# Altium PCB ESP-OLED.PcbDoc
Units mm, origin at the board's own origin, x right, y up, seen from the top; angles counter-clockwise.
Board outline 30.99 x 15.24 mm, 2 copper layers (Top Layer, Bottom Layer); 13 components, 11 nets, 67 pads, 0 vias.
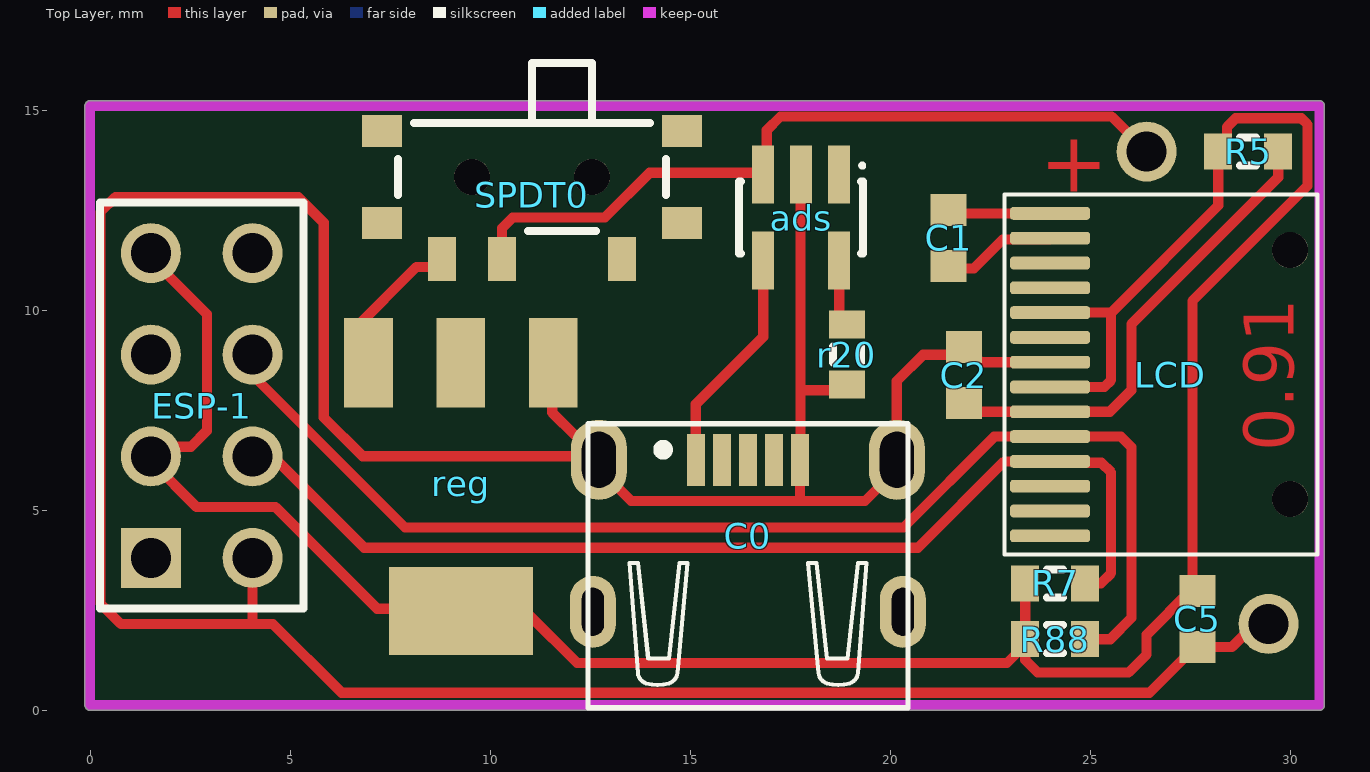
[diagram p0: Top Layer view]
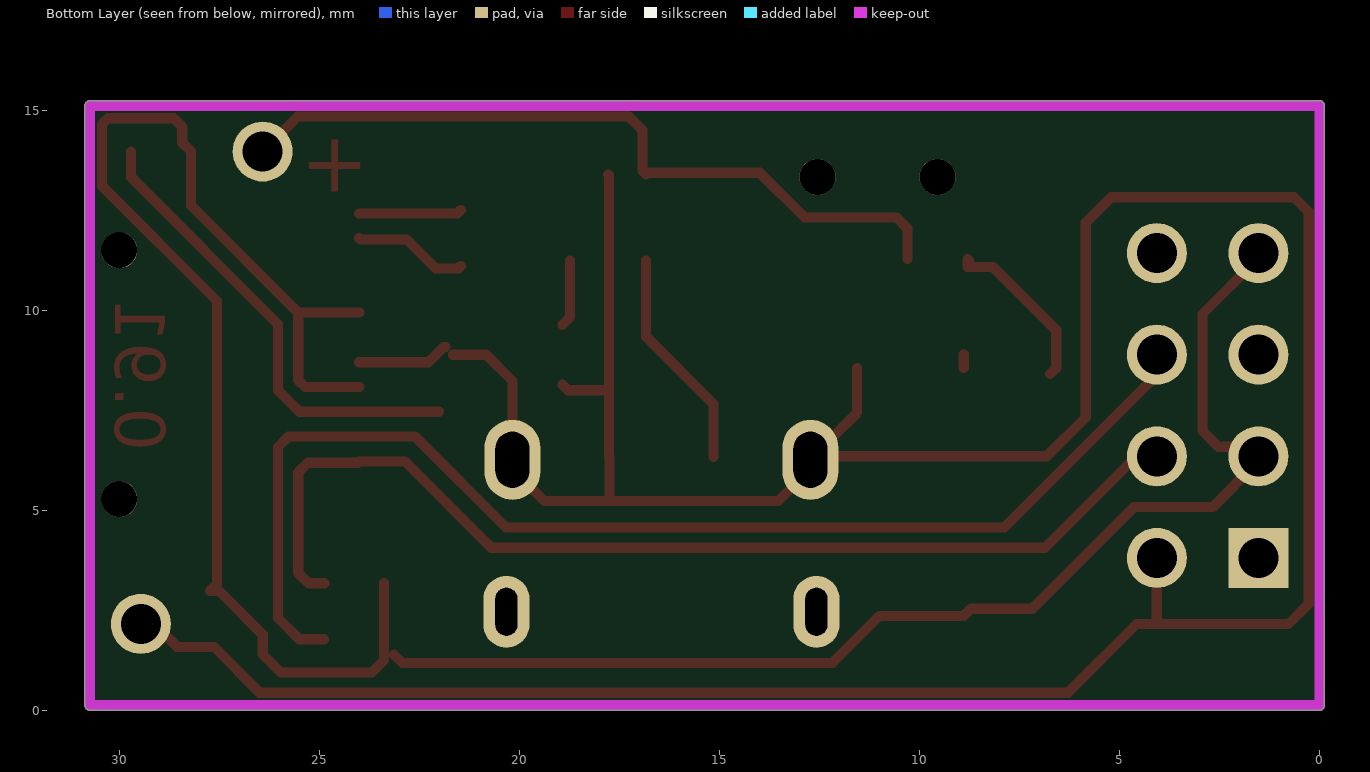
[diagram p1: Bottom Layer view, seen from below]

## Layer stack, top to bottom
Top Solder: solder mask 0.0102, Solder Resist, Dk 3.5
Top Layer: signal copper 0.0356
Dielectric 1: dielectric 0.32, FR-4, Dk 4.8
Bottom Layer: signal copper 0.0356
Bottom Solder: solder mask 0.0102, Solder Resist, Dk 3.5

## Board outline
0,0 cw(c0,0.127) -0.127,0.127 -0.127,15.113 cw(c0,15.113) 0,15.24 30.734,15.24 cw(c30.734,15.113) 30.861,15.113 30.861,0.127 cw(c30.734,0.127) 30.734,0

## Design rules (kind name [scope] priority, off if disabled: settings)
Clearance Clearance_1 [OnLayer('Keep-Out Layer')] p1: gap=0.01 ignorepadtopadclearanceinfootprint=FALSE
Clearance [All] p2: gap=0.254 ignorepadtopadclearanceinfootprint=FALSE except(0: SMDPad-SMDPad)
ComponentClearance [All] p1: gap=0 collisioncheckmode=3 verticalgap=0 showdistances=TRUE
PolygonConnect [All] p1: connectstyle=Relief reliefconductorwidth=0.254 reliefentries=4 polygonreliefangle="90 Angle" airgapwidth=0.254
RoutingVias [All] p1: holewidth=0.711 width=1.27 viastyle="Through Hole" minholewidth=0.711 minwidth=1.27 maxholewidth=0.711 maxwidth=1.27
SolderMaskExpansion [All] p1: expansion=0.102
Width [All] p1: maxlimit=0.254 minlimit=0.254 preferedwidth=0.254
29 further rules are at their usual default settings.

## Components (designator, comment, footprint, x,y, rotation, side; value= is the part's Value field where it differs from the comment)
ads "LTC4054-4.2" S5 17.78,12.319 r180 top
C0 "WR-Communication Connectors 629105150521" 629105150521_no_fixtures 16.448,6.263 r0 top
C1 "Cap Semi" 1608[0603] 21.463,11.811 r90 top value=1uF
C2 "Cap Semi" 1608[0603] 21.844,8.382 r270 top value=1uF
C5 "Cap Semi" 1608[0603] 27.686,2.286 r90 top value=4.7uF
ESP-1 "Header 4X2" ESP-01 0.254,2.54 r0 top
LCD "Header 14" OLED0.91 24.003,12.423 r270 top
R5 "Res3" J1-0603 28.956,13.97 r180 top value=10K
R7 "Res3" J1-0603 24.13,3.175 r180 top value=10K
r20 "Res3" J1-0603 18.923,8.89 r270 top value=3.3k
R88 "Res3" J1-0603 24.13,1.778 r180 top value=10K
reg "AMS1117-3.3" SOT223 9.271,5.588 r270 top
SPDT0 "450404015514" 450404015514 11.049,13.335 r0 top

## Footprints (in the part's own frame and the unit in brackets; to place one, negate y for a bottom-side part, rotate by r counter-clockwise, add the part's x,y. Pads: shape width x height; smd on the part's side, far side on the other; paste and mask are expansions set on the pad)
1608[0603] [mm] "Chip Capacitor, Body 1.6x0.8mm, IPC High Density"
  rect 0.8x0.9 smd: 1(-0.7,0) 2(0.7,0)
  body extent -0.87,-0.48 0.87,0.48, height 1.3
450404015514 [mm] "Right angle Slide Switch"
  rect 0.7x1.1 smd: 1(2.25,-2.05) 2(-0.75,-2.05) 3(-2.25,-2.05)
  round 0.9 hole 0.9 unplated: M1(-1.5,0) M2(1.5,0)
  rect 1x0.8 smd: M3(-3.75,1.15) M4(3.75,1.15) M5(-3.75,-1.15) M6(3.75,-1.15)
  silkscreen extent -3.35,-1.35 3.35,2.85, body extent -3.85,-2.25 3.85,2.88, height 1.4
629105150521_no_fixtures [mm] "WR-COM_USB_Micro Type B_Horizontal_SMT Micro Type B Horizontal SMT - 3A current at Pin1 & Pin 5 - with Pegs and THT shielding Pins  - T&R Packaging"
  rect 0.45x1.3 smd: 1(-1.3,0) 2(-0.65,0) 3(0,0) 4(0.65,0) 5(1.3,0)
  oval 1.4x2 hole 0.85 slot 1.4 at 90 deg: Z1(-3.725,0) Z2(3.725,0)
  oval 1.15x1.8 hole 0.55 slot 1.2 at 90 deg: Z4(-3.875,-3.8) Z4(3.875,-3.8)
  silkscreen extent -4,-6.2 4,0.9, body extent -4,-6.25 4,0.35, height 2.67
ESP-01 [mm]
  rect 1.5x1.5 hole 1: 1(1.27,1.27)
  round 1.5 hole 1: 2(3.81,1.27) 3(1.27,3.81) 4(3.81,3.81) 5(1.27,6.35) 6(3.81,6.35) 7(1.27,8.89) 8(3.81,8.89)
  silkscreen extent 0,0 5.08,10.16, body extent -0.25,-2.54 24.55,12.34, height 11.5
J1-0603 [mm] "Chip Resistor, Body 1.6x0.8mm, IPC High Density"
  rect 0.7x0.9 smd: 1(-0.75,0) 2(0.75,0)
  silkscreen extent -0.2,-0.35 0.2,0.35, body extent -0.85,-0.48 0.85,0.48, height 0.9
OLED0.91 [mm]
  rrect50% 0.32x2 smd: 1(0,0) 2(0.62,0) 3(1.24,0) 4(1.86,0) 5(2.48,0) 6(3.1,0) 7(3.72,0) 8(4.34,0) 9(4.96,0) 10(5.58,0) 11(6.2,0) 12(6.82,0) 13(7.44,0) 14(8.06,0)
  round 0.9 hole 0.9 unplated: 6(0.92,6) 6(7.14,6)
  silkscreen extent -0.47,-1.14 8.53,6.69, body extent -0.46,-23.65 11.05,11.25, height 0.08
S5 [mm] "SOT-23/SC-74A; 5 Leads; Body 3.1 x 3 mm, inc. leads (LxW max)"
  rect 0.55x1.45 smd: 1(-0.95,-1.075) 2(0,-1.075) 3(0.95,-1.075) 4(0.95,1.075) 5(-0.95,1.075)
  silkscreen extent -1.58,-1.35 1.55,0.9
SOT223 [mil]
  rect 88x48 smd: 1(-122,91) 2(-122,0) 3(-122,-91)
  rect 86.61x141.73 smd: 2(122.01,0)

## Part data
C0: "WR-COM_USB_Micro Type B_Horizontal_SMT", Manufacturer="Würth Elektronik eiSos GmbH", partNo=629105150521, ComponentLink1 Description=Manufacturer, ComponentLink1URL=http://www.we-online.de, ComponentLink2 Description=Datasheet, ComponentLink2URL=http://katalog.we-online.de/em/datasheet/629105150521.pdf, Created by="Karrer Zheng", Created Date=10/21/2014, NoPins=5
C1 C2 C5: "Capacitor (Semiconductor SIM Model)", LatestRevisionDate=29-May-2009, LatestRevisionNote="IPC-7351 Footprint Added.", PackageDescription="Chip Capacitor", PackageReference=C1206, Published=8-Jun-2000, Publisher="Altium Limited"
ESP-1: "Header, 4-Pin, Dual row", LatestRevisionDate=17-Jul-2002, LatestRevisionNote="Re-released for DXP Platform.", Publisher="Altium Limited"
LCD: "Header, 14-Pin", LatestRevisionDate=17-Jul-2002, LatestRevisionNote="Re-released for DXP Platform.", Publisher="Altium Limited"
R5 R7 r20 R88: "Resistor", LatestRevisionDate=29-May-2009, LatestRevisionNote="IPC-7351 Footprint Added.", PackageDescription="Chip Resistor", PackageReference=J1-0603, Published=8-Jun-2000, Publisher="Altium Limited"
SPDT0: "WS-SLSU Mini SMT Slide Switch, Same Side Connection, Right Angled, SPDT", Operating Temperature="-40 to +85degC", Rated Current=300mA, Rated Voltage=5VDC, Circuit=SPDT, ComponentLink1Description=Manufacturer, ComponentLink1URL=http://www.we-online.de, ComponentLink2Description=Datasheet, ComponentLink2URL=https://katalog.we-online.com/em/datasheet/450404015514.pdf, Contact Material="Copper Alloy", Contact Plating=Silver, Mounting Technology=SMT, Packaging="Tape and Reel", Part Number=450404015514, Published Date="September 2019", Publisher="Wurth Elektronik", Size=6.7x2.7mm, Switching Function=On-On, Terminal Material="Copper Alloy", Terminal Plating=Silver

## Free pads (board coordinates)
  round 1.5 hole 1: 5(26.416,13.97) 5(29.464,2.159)

## Nets (pads, with @x,y where several pads share a name; then routed paths per layer and width w, separated by ;. In a path a pad name is that pad's centre, name@x,y a point inside that pad or via, vN(x,y) a via of type N, cw(c..) or ccw(c..) an arc to the next point about the centre after c; other vN are vias at no path point)
+5: reg.3 SPDT0.3 | length 4.3
  Top Layer w0.254: reg.3@6.731,8.407 6.579,8.56 6.579,9.5 8.164,11.085 8.799,11.085 SPDT0.3 SPDT0.3@8.763,11.249
BAT: ads.3 pad.5@26.416,13.97 SPDT0.2 | length 19.1
  Top Layer w0.254: SPDT0.2 10.299,12.053 10.565,12.319 12.869,12.319 13.991,13.441 16.83,13.441 ads.3 16.92,13.484 16.92,14.5 17.264,14.845 25.541,14.845 pad.5@26.416,13.97
GND: ads.2 C0.5 C0.Z1 C0.Z2 C2.1 C5.1 ESP-1.2 LCD.7 pad.5@29.464,2.159 r20.2 reg.1 | length 87.7
  Top Layer w0.254: ESP-1.2 4.064,2.159 ; 5.849,12.185 5.842,12.192 ; reg.1@11.557,8.56 11.557,7.442 12.14,6.859 12.201,6.859 12.72,6.34 C0.Z1@12.72,6.266 ; C0.Z1 C0.Z1@12.72,6.266 ; C0.5@17.745,6.34 17.762,6.357 17.762,8.001 ; 17.748,5.327 C0.5 ; ads.2 17.762,13.377 17.762,8.001 ; r20.2 18.784,8.001 17.762,8.001 ; C0.Z2@20.17,6.263 20.17,8.232 20.828,8.89 C2.1@21.655,8.89 ; C0.Z2@20.173,5.481 C0.Z2@20.173,6.03 ; C0.Z2 C0.Z2@20.173,6.03 ; C2.1 21.894,9.082 22.273,8.703 LCD.7 ; pad.5@29.464,2.159 29.127,2.159 28.554,1.586 C5.1 27.636,1.586 26.489,0.439 6.292,0.439 4.572,2.159 4.064,2.159 ; 4.064,2.159 0.772,2.159 0.264,2.667 0.264,12.456 0.635,12.827 5.207,12.827 5.842,12.192 ; 5.842,12.192 5.842,7.322 6.814,6.35 12.636,6.35 C0.Z1@12.72,6.266 ; C0.Z1@12.72,6.266 12.72,6.04 13.528,5.232 19.375,5.232 C0.Z2@20.173,6.03
Netads_4: ads.4 C0.1 | length 5.6
  Top Layer w0.254: C0.1@15.145,6.34 15.145,7.652 16.83,9.337 ads.4
Netads_5: ads.5 r20.1 | length 1.7
  Top Layer w0.254: ads.5 18.73,9.833 r20.1
NetC1_1: C1.1 LCD.2 | length 2.9
  Top Layer w0.254: C1.1 21.525,11.049 22.098,11.049 22.819,11.77 23.97,11.77 LCD.2
NetC1_2: C1.2 LCD.1 | length 2.6
  Top Layer w0.254: C1.2 21.551,12.423 LCD.1
NetC2_2: C2.2 LCD.9 R5.1 | length 11.7
  Top Layer w0.254: C2.2@22.006,7.463 LCD.9 25.497,7.463 26.035,8.001 26.035,9.652 29.706,13.323 R5.1
SCL: ESP-1.6 LCD.10 R88.1 | length 30.8
  Top Layer w0.254: ESP-1.6 4.064,8.382 7.874,4.572 20.335,4.572 22.607,6.843 LCD.10 25.774,6.843 26.035,6.582 26.035,2.308 25.505,1.778 R88.1
SDA: ESP-1.4 LCD.11 R7.1 | length 26.7
  Top Layer w0.254: ESP-1.4 4.572,6.35 6.858,4.064 20.701,4.064 22.86,6.223 LCD.11 24.036,6.19 25.285,6.19 25.527,5.948 25.527,3.429 25.273,3.175 R7.1
VCC: C5.2 ESP-1.3 ESP-1.7 LCD.5 LCD.8 R5.2 R7.2 R88.2 reg.2 | length 64.2
  Top Layer w0.254: ESP-1.7 1.524,11.303 2.921,9.906 2.921,6.985 2.524,6.588 1.762,6.588 ESP-1.3 1.524,6.223 2.667,5.08 4.641,5.08 7.181,2.54 8.712,2.54 8.89,2.362 10.998,2.362 12.177,1.182 22.924,1.182 R88.2@23.138,1.397 ; reg.2@8.89,8.56 reg.2@8.89,8.89 ; R7.2 R88.2 23.38,1.258 23.691,0.947 25.966,0.947 26.416,1.397 26.416,1.893 27.509,2.986 C5.2 27.736,2.986 27.559,3.163 27.559,10.234 30.437,13.112 30.437,14.648 30.284,14.801 28.644,14.801 28.429,14.586 28.429,14.193 R5.2 28.206,12.622 25.527,9.943 ; LCD.8 25.355,8.083 25.527,8.255 25.527,9.943 ; LCD.5 25.527,9.943
pads on no net: ads.1 C0.2 C0.3 C0.4 C0.Z4 ESP-1.1 ESP-1.5 ESP-1.8 LCD.3 LCD.4 LCD.6 LCD.12 LCD.13 LCD.14 SPDT0.1 SPDT0.M1 SPDT0.M2 SPDT0.M3 SPDT0.M4 SPDT0.M5 SPDT0.M6

## Polygon pours and split planes (outlines as drawn)
no net on Top Layer "Top Layer-No Net" (solid, pour order 4): 23.953,14.986

## Keep-outs
Keep-Out Layer:
  lines w0.254: 0,0.127 30.734,0.127 30.734,15.113 0,15.113 0,0.127

## Other copper
Top Layer:
  text "+" at 23.749,12.96 h1.5
  text "0.91" at 30.099,6.477 h1.25 r90

## Silkscreen, mask and mechanical layers (free items; w line width, h text height)
Top Solder:
  text "+" at 23.749,12.96 h1.5
  text "0.91" at 30.099,6.477 h1.25 r90